# Altium PCB PCB_Control.V03.R00.PcbDoc (part 4 of 7)
Units mm, origin at the board's own origin, x right, y up, seen from the top; angles counter-clockwise.
Board outline 188 x 90 mm, 6 copper layers (Top Layer, GND 1, PWR, Signal L4, GND 2, Bottom Layer), stack 1.548 mm thick; 541 components, 265 nets, 1491 pads, 2159 vias.
Unrouted connection lines stored in the file: 819.
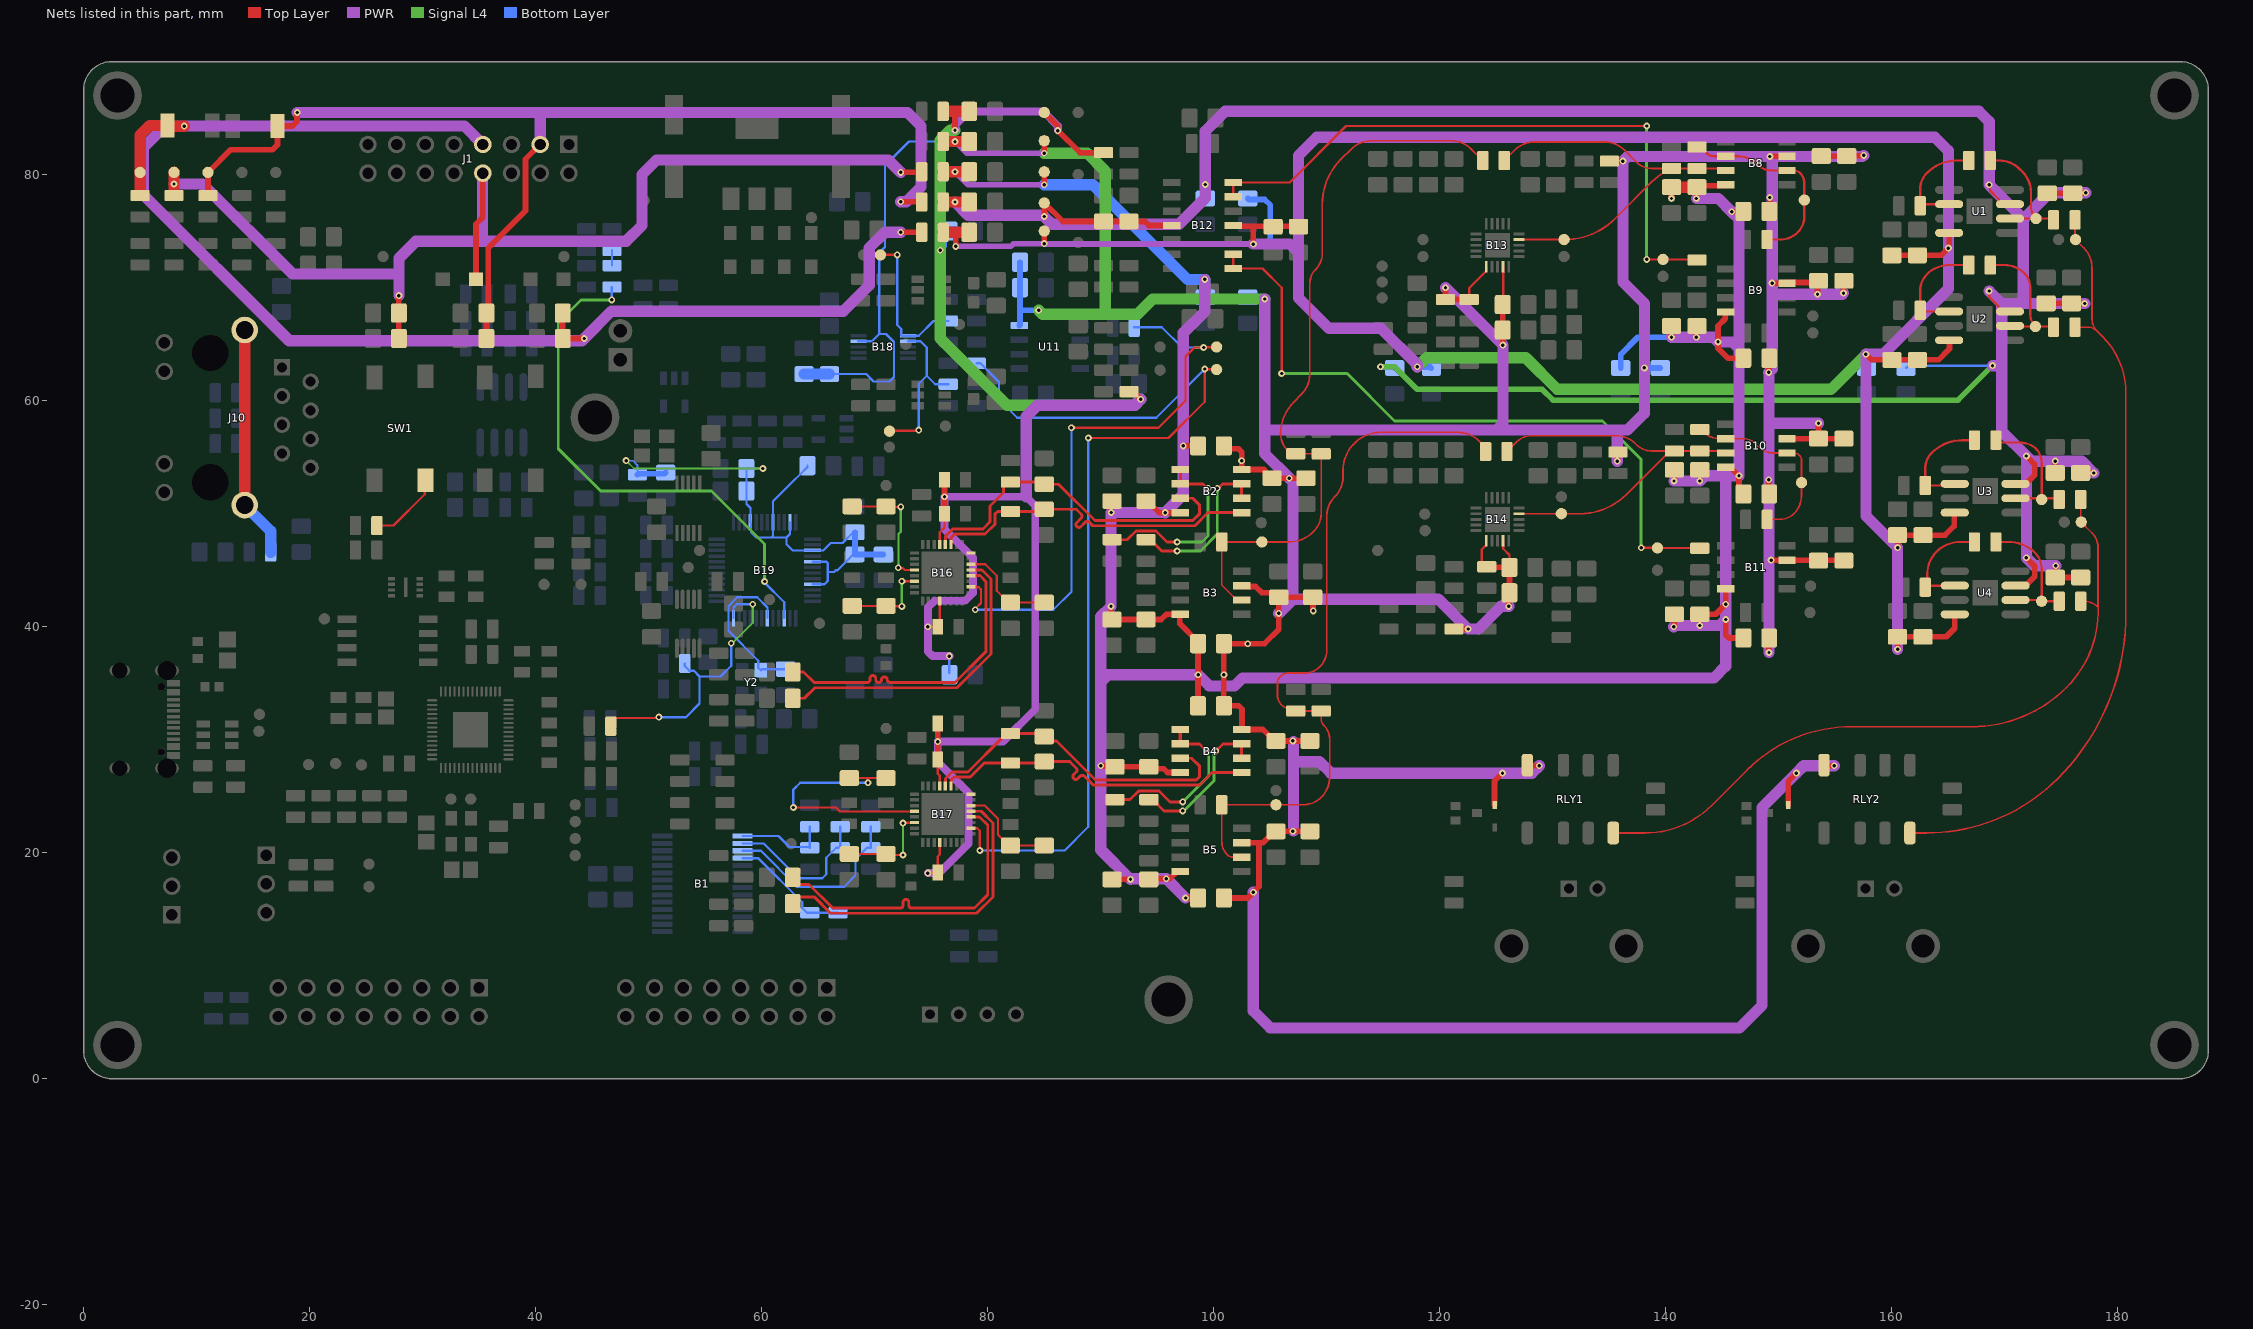
[diagram p7: the nets of this part, all layers, seen from the top]

## Via types
v1: diameter 0.6, hole 0.3, Top Layer to Bottom Layer, tented both sides, 1686 vias
v2: diameter 0.6, hole 0.3, Top Layer to Bottom Layer, 448 vias
v3: diameter 0.5, hole 0.2, Top Layer to Bottom Layer, tented both sides, 16 vias
v4: diameter 0.6, hole 0.25, Top Layer to Bottom Layer, tented both sides, 9 vias

## Nets (pads, with @x,y where several pads share a name; then routed paths per layer and width w, separated by ;. In a path a pad name is that pad's centre, name@x,y a point inside that pad or via, vN(x,y) a via of type N, cw(c..) or ccw(c..) an arc to the next point about the centre after c; other vN are vias at no path point) (continued)
+15V: C22.1 C23.1 D10.1 FB5.1 J1.3 R3.2 TP9.1 | length 100.8
  Top Layer w0.5: R3.2@11,78.15 TP9.1@11,80.2 13,82.2 16.7,82.2 17.15,82.65 D10.1@17.15,84.3 18.485,84.3 18.881,84.696 18.881,85.481 v1(18.9,85.5) ; C23.1@35.643,65.5 C22.1@35.643,67.75 35.8,67.907 35.8,73.5 39.1,76.8 39.1,81.37 J1.3@40.4,82.67 ; v1(72.3,77.6) 72.312,77.588 74.138,77.588 FB5.1@74.15,77.575
  PWR w1: v1(18.9,85.5) 40.4,85.5 ; J1.3@40.4,82.67 40.4,85.5 ; v1(72.3,77.6) 72.8,77.6 74.1,78.9 74.1,84.3 72.9,85.5 40.4,85.5
+A3V3: B16.12 B16.29 B17.12 B17.29 C8.1 C9.1 C10.1 C142.1 C143.1 C144.1 C156.1 C157.1 C158.1 FB2.2 R82.1 R87.1 TP2.1 | length 173.7
  Top Layer w0.2: v1(74.7,18.2) 75.525,18.2 C158.1@75.575,18.25 75.575,19.675 75.75,19.85 B17.12@75.75,20.925 ; v1(74.7,40) C143.1@75.575,40 75.75,40.175 B16.12@75.75,42.271 ; C157.1@75.575,28.25 75.575,27 75.75,26.825 B17.29@75.75,25.925 ; B16.29@75.75,47.271 75.75,48.35 76.175,48.775 C142.1@76.175,50
  Top Layer w0.5: C157.1@75.575,28.25 v1(75.575,29.837) C156.1@75.575,31.425 ; C142.1@76.175,50 v1(76.175,51.5) C144.1@76.175,53 ; v1(77.1,83.925) 77.1,85.496 77.204,85.6 ; TP2.1@85,85.5 86.181,84.319 86.181,83.919 v1(86.2,83.9) ; v1@86.233,83.933 86.233,83.867 88.15,81.95 R82.1@90.25,81.95 ; R87.1@92.5,60.8 92.85,60.8 v1(93.526,60.124)
  Top Layer w1: FB2.2@76.05,85.6 77.204,85.6 C8.1@78.357,85.6
  PWR w0.7: v1(74.7,18.2) 75.7,18.2 78.3,20.8 78.3,25.3 75.575,28.025 v1(75.575,29.837) 81.337,29.837 84.2,32.7 84.2,50.7 83.4,51.5 v1(76.175,51.5) 76.175,48.625 78.7,46.1 78.7,43 78,42.3 75.3,42.3 74.7,41.7 v1(74.7,40) 74.7,37.81 75.11,37.4 v1(76.6,37.4) ; v1(77.1,83.925) 77.1,84.4 78.3,85.6 84.9,85.6 86.2,84.3 v1(86.2,83.9)
  PWR w1: 83.4,51.5 83.4,58.6 84.4,59.6 93.001,59.6 v1(93.526,60.124)
  Signal L4 w1: v1(77.1,83.925) 76.686,83.925 75.8,83.039 75.8,65.5 81.7,59.6 93.001,59.6 v1(93.526,60.124)
  Bottom Layer w0.2: C10.1@76.6,35.9 v1(76.6,37.4)
  Bottom Layer w0.5: v1(75.8,73.3) 75.8,73.327 76.157,73.684 76.157,74.55 C9.1@76.607,75
+A5V: B2.8 B3.7 B4.8 B5.7 B8.7 B9.7 B10.7 B11.7 B13.6 B13.9 B14.6 B14.9 B18.9 C3.1 C4.1 C5.1 C46.2 C47.2 C50.2 C51.2 C52.2 C55.2 C56.2 C57.2 C60.2 C61.2 C62.2 C65.2 C87.2 C88.2 C89.2 C90.2 C91.2 C92.2 C97.2 C98.2 C99.2 C100.2 C101.2 C102.2 C124.2 C125.2 C135.2 C136.2 C176.2 C177.2 C178.2 C179.2 D11.1 D12.1 FB1.2 R90.2 R91.2 R97.2 R99.2 R100.2 R106.2 RLY1.8 RLY2.8 TP1.1 U11.8 | length 534.1
  Top Layer w0.2: R91.2@122.6,68.95 122.6,69.975 124.1,71.475 B13.6@124.1,71.85 ; B14.6@124.1,47.6 124.075,47.575 124.075,47.2 123.7,46.825 123.7,45.698 124.123,45.275 R100.2@124.175,45.275 ; C125.2@125.557,66.25 C125.2@125.6,66.293 ; B14.9@125.6,47.6 125.6,46.9 126.157,46.343 C135.2@126.157,45.25 ; C124.2@125.6,68.5 B13.9@125.6,71.85
  Top Layer w0.5: v1(85,81.9) TP1.1@85,83 ; C65.2@100.893,16 103,16 v1(103.5,16.5) 104,17 104,20.885 ; C50.2@100.893,56 101.143,55.75 102.169,55.75 102.462,55.457 v1(102.462,54.681) B2.8@102.462,53.905 104.438,53.905 104.55,53.793 104.55,53.593 105,53.143 C46.2@105.15,53.143 ; B5.7@102.462,20.885 104,20.885 ; B3.7@102.462,43.635 102.537,43.56 103.69,43.56 104.25,43 105.357,43 C51.2@105.75,42.607 C52.2@108.75,42.607 108.781,42.576 108.781,41.419 v1(108.8,41.4) ; C46.2@105.2,53.143 v1(106.675,53.143) C47.2@108.15,53.143 ; C51.2@105.75,42.607 v1(105.75,41.178) 105.75,39.75 104.5,38.5 v1(103,38.5) C55.2@100.893,38.5 v1(100.893,35.75) C60.2@100.893,33 102.207,33 102.5,32.707 102.5,30.943 B4.8@102.462,30.905 104.338,30.905 105.35,29.893 C56.2@105.5,29.893 v1(107,29.893) C57.2@108.5,29.893 ; C62.2@108.5,21.893 v1(107,21.893) C61.2@105.5,21.893 105.35,21.893 104.342,20.885 104,20.885 ; v1(120.5,70) R90.2@120.5,68.95 R91.2@122.6,68.95 ; R99.2@121.25,39.8 v1(122.5,39.8) ; R100.2@124.175,45.275 126.132,45.275 C135.2@126.157,45.25 C136.2@126.157,43 126.119,42.962 126.119,41.819 v1(126.1,41.8) ; D11.1@124.84,24.245 124.84,26.34 v1(125.545,27.045) ; C125.2@125.557,66.25 125.581,66.226 v1(125.581,64.919) ; C124.2@125.557,68.5 125.557,66.397 ccw(c125.704,66.397) C125.2@125.6,66.293 ; RLY1.8@127.739,27.75 127.789,27.7 v1(128.8,27.7) ; R97.2@135,81.2 v1(136.2,81.2) ; v1(135.7,54.65) 135.719,54.669 135.719,55.419 R106.2@135.75,55.45 ; v1(149.1,53) 149.119,52.981 149.119,51.774 C101.2@149.143,51.75 ; v1(149.1,62.5) 149.119,62.519 149.119,63.726 C92.2@149.143,63.75 ; v1(149.119,37.719) 149.119,38.976 C102.2@149.143,39 ; C91.2@149.143,76.75 149.181,76.788 v1(149.181,77.981) ; v1(149.2,81.6) 149.217,81.617 150.695,81.617 B8.7@150.712,81.635 ; v1(149.308,45.892) 150.705,45.892 B11.7@150.712,45.885 150.726,45.871 153.5,45.871 155.736,45.871 C100.2@155.75,45.857 ; v1(149.4,70.4) 149.408,70.392 150.705,70.392 B9.7@150.712,70.385 150.787,70.46 C89.2@153.419,70.46 ; B10.7@150.712,56.635 150.716,56.639 155.746,56.639 C97.2@155.75,56.643 ; D12.1@150.84,24.245 150.84,26.34 v1@151.554,27.054 ; v1(153.419,69.419) 153.419,70.526 C89.2@153.5,70.607 ; C98.2@153.5,56.643 v1(153.5,58) ; C88.2@153.75,81.639 155.996,81.639 156.038,81.681 157.481,81.681 v1(157.5,81.7) ; RLY2.8@153.989,27.75 154.039,27.7 v1(154.9,27.7) ; v1(155.719,69.519) 155.719,70.576 C90.2@155.75,70.607
  Top Layer w1: FB1.2@76.05,82.925 v1(77.1,82.925) C3.1@78.357,82.925
  PWR w0.5: v1(77.1,82.925) 78.125,81.9 v1(85,81.9)
  PWR w1: v1(103.5,16.5) 103.5,6 105,4.5 146.5,4.5 148.5,6.5 148.5,24 v1(151.545,27.045) 152.2,27.7 v1(154.9,27.7) ; v1(104.5,69) 104.5,57.4 ; v1(105.75,41.178) 107,42.428 ; v1@107.054,21.946 107.054,28.047 ; v1@107.054,29.84 107.054,28.047 ; v1(120.5,70) v1(125.581,64.919) 125.581,57.981 125,57.4 ; v1(126.1,41.8) 125.407,41.8 123.407,39.8 v1(122.5,39.8) 119.872,42.428 107,42.428 ; v1(128.8,27.7) 128.145,27.045 110.355,27.045 109.353,28.047 107.054,28.047 ; v1(135.7,54.65) 135.7,57 135.3,57.4 ; v1(149.119,37.719) 149.119,45.892 149.119,53 149.119,58 ; v1(153.5,58) 149.119,58 ; v1(155.719,69.519) 155.619,69.419 v1(153.419,69.419) 149.4,69.419 ; v1(157.5,81.7) 157.4,81.6 v1(149.2,81.6) ; 104.5,57.4 125,57.4 ; 104.5,57.4 104.5,55.318 v1(106.675,53.143) 107,52.818 107,42.428 ; 125,57.4 135.3,57.4 ; 135.3,57.4 136.6,57.4 138.1,58.9 v1(138.1,62.9) 138.1,68.6 136.2,70.5 v1(136.2,81.2) 136.6,81.6 v1(149.2,81.6) ; 149.119,58 149.119,62.481 v1(149.1,62.5) 149.4,62.8 149.4,69.419 ; v1(149.2,81.6) 149.4,81.4 149.4,77.981 v1(149.4,70.4) 149.4,69.419
  Signal L4 w1: v1(84.5,68) 84.85,67.65 90.1,67.65 ; v1(85,81.9) 88.8,81.9 90.4,80.3 90.4,67.95 90.1,67.65 ; v1(104.5,69) 94.6,69 93.25,67.65 90.1,67.65
  Bottom Layer w0.2: C178.2@66,62.357 69.243,62.357 69.9,61.7 71.3,61.7 71.7,62.1 71.7,65.2 71,65.9 70.4,65.9 ; B18.9@68.55,65.25 69.75,65.25 70.4,65.9 ; v1(77.1,82.925) 73.025,82.925 70.9,80.8 70.9,73.6 70.4,73.1 70.4,65.9
  Bottom Layer w0.5: U11.8@82.8,66.655 82.807,66.655 82.857,66.705 82.857,68 ; C176.2@82.857,72.25 C177.2@82.857,70 82.857,68 ; v1(84.5,68) 82.857,68 ; C4.1@102.85,69.143 C4.1@103,69.143 103.124,69.019 104.481,69.019 v1(104.5,69) ; v1(138.1,62.9) 138.104,62.896 139.497,62.896 C5.1@139.5,62.893
  Bottom Layer w1: C179.2@63.75,62.357 C178.2@66,62.357
+A15V: B12.4 C24.1 C25.1 C26.1 C27.1 C28.1 C29.1 C30.1 C31.1 C36.1 C37.1 C38.1 C39.1 C111.2 C112.2 FB5.2 TP12.1 U1.7 U2.7 U3.7 U4.7 | length 275.5
  Top Layer w0.2: v1(168.6,69.7) 168.6,69.176 169.444,68.331 169.444,68.116 169.675,67.885 U2.7@170.44,67.885 ; v1(168.6,79.1) 168.677,79.023 168.677,78.599 169.456,77.82 169.456,77.616 169.687,77.385 U1.7@170.44,77.385
  Top Layer w0.5: v1(85,76.3) TP12.1@85,77.5 86.643,75.857 C111.2@90.25,75.857 C112.2@92.5,75.857 93.893,75.857 94.25,75.5 B12.4@96.288,75.5 ; U4.7@170.94,43.635 171.84,43.635 172.64,44.435 172.64,45.355 171.9,46.095 v1(171.9,46.1) ; U3.7@170.94,52.635 171.84,52.635 172.64,53.435 172.64,54.36 v1(171.9,55.1) ; C30.1@173.65,68.607 C31.1@175.9,68.607 175.904,68.604 177.047,68.604 v1(177.05,68.6) ; C28.1@173.75,78.357 C29.1@176,78.357 176.024,78.381 177.131,78.381 v1(177.15,78.4) ; C36.1@174.45,53.607 v1(174.45,54.65) ; v1(174.5,45.4) 174.481,45.381 174.481,44.388 C38.1@174.45,44.357 C39.1@176.7,44.357 ; C37.1@176.7,53.607 176.704,53.603 177.847,53.603 v1(177.85,53.6)
  Top Layer w1: FB5.2@76.05,77.575 v1(77.1,77.575) C24.1@78.357,77.575
  PWR w1: v1(77.1,77.575) 78.275,76.4 84.9,76.4 85.7,75.6 96.9,75.6 99.25,77.95 v1(99.25,79.123) 99.25,83.85 101,85.6 167.7,85.6 168.6,84.7 v1(168.6,79.1) 171.629,76.071 ; v1(168.6,69.7) 169.7,68.6 171.629,68.6 ; v1(168.9,63.1) 169.71,63.1 ; 169.71,68.6 169.71,63.1 ; v1(174.5,45.4) 172.6,45.4 v1(171.9,46.1) v1(171.9,55.1) ; v1(177.05,68.6) 171.629,68.6 ; v1(177.15,78.4) 173.957,78.4 171.629,76.071 ; v1(177.85,53.6) 176.8,54.65 v1(174.45,54.65) 172.35,54.65 v1(171.9,55.1) ; 169.71,63.1 169.71,57.29 v1(171.9,55.1) ; 171.629,68.6 171.629,76.071
  Signal L4 w0.5: v1(114.75,63) 116,63 118,61 129.057,61 130.007,60.05 165.85,60.05 v1(168.9,63.1)
  Bottom Layer w0.2: C26.1@161.25,62.893 161.457,63.1 v1(168.9,63.1)
  Bottom Layer w0.5: C25.1@99.25,77.893 v1(99.25,79.123) ; v1(114.75,63) 114.769,62.981 115.912,62.981 C27.1@116,62.893
-5V: C11.1 C12.1 D3.2 FB3.1 J1.8 R4.2 TP10.1 | length 101
  Top Layer w0.5: C12.1@27.893,65.5 C11.1@27.893,67.75 27.897,67.753 27.897,69.297 v1(27.9,69.3) ; D3.2@34.725,70.75 34.725,75.625 35.32,76.22 J1.8@35.32,80.13 ; v1(72.3,80.2) 72.319,80.219 74.119,80.219 FB3.1@74.15,80.25
  Top Layer w1: R4.2@8,78.15 TP10.1@8,80.2
  PWR w1: v1(8,79.175) 10.525,79.175 18.5,71.2 27.9,71.2 ; v1(27.9,69.3) 27.9,71.2 ; J1.8@35.32,80.13 35.32,79.896 35.3,79.876 35.3,74.2 35.2,74.1 ; v1(72.3,80.2) 71.2,81.3 50.7,81.3 49.4,80 49.4,75.5 48,74.1 35.2,74.1 ; 27.9,71.2 27.9,72.6 29.4,74.1 35.2,74.1
-15V: C16.1 C17.1 D4.2 FB4.1 J1.7 R5.2 TP11.1 | length 129.6
  Top Layer w0.5: C16.1@42.393,67.75 C17.1@42.393,65.5 v1(44.3,65.5) ; v1(72.3,74.9) FB4.1@74.15,74.9
  Top Layer w1: R5.2@5,78.15 TP11.1@5,80.2 5,83.5 5.85,84.35 D4.2@7.42,84.35 7.477,84.293 v1(8.907,84.293)
  PWR w1: v1(8.907,84.293) 8.9,84.3 7.2,84.3 5.3,82.4 5.3,78.2 18.2,65.3 44.1,65.3 v1(44.3,65.5) 46.719,67.919 46.774,67.919 46.775,67.92 48.225,67.92 48.226,67.919 67.219,67.919 69.5,70.2 69.5,73.5 70.9,74.9 v1(72.3,74.9) ; v1@8.907,84.3 33.69,84.3 J1.7@35.32,82.67
-A5V: B2.4 B3.4 B4.4 B5.4 B8.4 B9.4 B10.4 B11.4 C13.1 C14.1 C15.1 C48.2 C49.2 C50.1 C53.2 C54.2 C55.1 C58.2 C59.2 C60.1 C63.2 C64.2 C65.1 C91.1 C92.1 C93.1 C94.1 C95.1 C96.1 C101.1 C102.1 C103.1 C104.1 C105.1 C106.1 FB3.2 TP5.1 | length 287.8
  Top Layer w0.5: v1(85,79.1) TP5.1@85,80.25 ; v1(90,27.7) 90.019,27.681 91.176,27.681 C59.2@91.25,27.607 C58.2@94.25,27.607 94.414,27.443 95.557,27.443 95.897,27.103 97.03,27.103 B4.4@97.038,27.095 ; v1(90.9,41.8) 90.919,41.781 90.919,40.724 C54.2@91,40.643 C53.2@94,40.643 95.343,40.643 95.795,41.095 B3.4@97.038,41.095 97,41.057 97,40.257 98.607,38.65 C55.1@98.607,38.5 v1(98.607,35.75) C60.1@98.607,33 ; v1(90.919,50.107) 90.938,50.126 90.938,51.045 C49.2@91,51.107 ; C64.2@91,17.643 v1(92.625,17.643) ; C48.2@94.15,51.107 95.162,50.095 v1(95.7,50.095) B2.4@97.038,50.095 ; C63.2@94.25,17.643 94.307,17.7 v1@95.773,17.7 ; v1(95.8,17.7) 95.819,17.719 96.119,17.719 96.526,18.126 96.526,18.27 96.601,18.345 B5.4@97.476,18.345 ; v1(97.3,56) C50.1@98.607,56 ; v1(97.5,16) C65.1@98.607,16 ; v1(140.5,65.607) C96.1@140.5,66.607 ; v1(140.5,77.893) C94.1@140.5,78.893 ; v1(140.7,40) 140.719,40.019 140.719,41.076 C106.1@140.75,41.107 ; v1(140.719,52.893) 140.735,52.908 140.735,53.878 C103.1@140.75,53.893 ; v1(142.7,65.607) 142.719,65.626 142.719,66.576 C95.1@142.75,66.607 ; v1(142.7,77.893) 142.719,77.912 142.719,78.862 C93.1@142.75,78.893 ; C93.1@142.877,79.02 145.213,79.02 B8.4@145.288,79.095 ; v1(143,40.107) C105.1@143,41.107 144.407,41.107 v1(145.288,41.988) B11.4@145.288,43.345 ; v1(143,52.893) C104.1@143,53.893 ; v1(145.288,40.64) 145.288,39.293 145.581,39 C102.1@146.857,39 ; B10.4@145.288,54.095 145.726,54.095 v1(146.471,53.35) 146.471,52.136 C101.1@146.857,51.75 ; B9.4@145.288,67.845 145.25,67.807 145.25,67.25 144.607,66.607 v1(144.607,65.2) 144.607,64.643 145.5,63.75 C92.1@146.857,63.75 ; v1(145.819,76.719) 146.826,76.719 C91.1@146.857,76.75
  Top Layer w1: FB3.2@76.05,80.25 v1(77.1,80.25) C13.1@78.357,80.25 ; C94.1@140.5,78.893 C93.1@142.75,78.893 C93.1@142.877,79.02
  PWR w0.5: v1(77.1,80.25) 78.25,79.1 v1(85,79.1)
  PWR w1: v1(97.5,16) v1(95.8,17.7) 92.682,17.7 v1(92.625,17.643) 90,20.268 v1(90,27.7) 90,35.1 ; v1(99.205,70.729) 99.205,67.905 97.3,66 v1(97.3,56) 97.3,51.695 v1(95.7,50.095) 95.688,50.107 v1(90.919,50.107) 90.9,50.088 v1(90.9,41.8) 90,40.9 90,35.1 ; v1(140.5,65.607) v1(142.7,65.607) 144.2,65.607 v1(144.607,65.2) 145.9,65.2 146.471,64.629 ; v1(140.7,40) 140.807,40.107 v1(143,40.107) 144.755,40.107 v1(145.288,40.64) ; v1(140.719,52.893) v1(143,52.893) 143.457,53.35 145.288,53.35 ; v1(142.7,77.893) 144.645,77.893 v1(145.819,76.719) 146.471,76.068 146.471,64.629 ; 90,35.1 90.65,35.75 v1(98.607,35.75) 99.607,34.75 101.836,34.75 102.554,35.468 144.244,35.468 145.288,36.512 v1(145.288,40.64) ; v1(145.288,40.64) v1(145.288,41.988) 145.288,53.35 ; 145.288,53.35 v1(146.471,53.35) 146.471,64.629
  Bottom Layer w0.5: C15.1@136,62.893 136,64.1 137.507,65.607 v1(140.5,65.607)
  Bottom Layer w1: v1(85,79.1) 89.3,79.1 97.671,70.729 v1(99.205,70.729) 99.205,69.188 C14.1@99.25,69.143
-A15V: B12.11 C18.1 C19.1 C20.1 C21.1 C32.1 C33.1 C34.1 C35.1 C40.1 C41.1 C42.1 C43.1 C113.2 C114.2 FB4.2 TP6.1 U1.4 U2.4 U3.4 U4.4 | length 259.1
  Top Layer w0.5: v1(77.168,73.651) 77.153,73.666 77.153,74.849 77.204,74.9 ; v1(85,73.9) TP6.1@85,75 ; B12.11@101.712,75.5 101.766,75.446 103.5,75.446 ; v1(103.5,73.857) 103.5,75.446 ; C114.2@107.5,75.393 107.447,75.446 103.5,75.446 ; v1(157.7,64.1) 157.727,64.1 158.22,63.607 C35.1@160,63.607 C34.1@162.25,63.607 164.107,63.607 165.1,64.6 165.1,65.305 U2.4@165.06,65.345 ; C33.1@160,72.857 C32.1@162.25,72.857 164.357,72.857 165.06,73.56 U1.4@165.06,74.845 ; v1(160.5,38) C43.1@160.5,39.107 C42.1@162.75,39.107 164.807,39.107 165.56,39.86 U4.4@165.56,41.095 ; v1(160.5,47) C41.1@160.5,48.107 C40.1@162.75,48.107 164.707,48.107 165.5,48.9 165.5,50.035 U3.4@165.56,50.095
  Top Layer w1: FB4.2@76.05,74.9 77.204,74.9 C18.1@78.357,74.9
  PWR w0.5: v1(77.168,73.651) v1(77.168,73.651) 82.05,73.65 82.273,73.873 84.902,73.873 84.91,73.881 84.965,73.881 v1@84.973,73.873 ; v1(85,73.9) 85.019,73.881 85.09,73.881 85.114,73.857 v1(103.5,73.857)
  PWR w1: v1(103.5,73.857) 106.743,73.857 107.5,73.1 ; v1(118,63) 118,63.2 114.8,66.4 110.2,66.4 107.5,69.1 107.5,73.1 ; v1(160.5,38) v1(160.5,47) 157.7,49.8 v1(157.7,64.1) 159.2,64.1 165,69.9 v1(165,73.5) 165,82.1 163.8,83.3 109.1,83.3 107.5,81.7 107.5,73.1
  Signal L4 w1: v1(118,63) 118.027,63 118.827,63.8 127.6,63.8 130.4,61 154.6,61 v1(157.7,64.1)
  Bottom Layer w0.5: C19.1@103,77.893 103.093,77.8 104.5,77.8 105,77.3 105,74.3 104.557,73.857 v1(103.5,73.857) ; v1(118,63) 118.019,62.981 119.162,62.981 C21.1@119.25,62.893 ; v1(157.7,64.1) 157.719,64.081 157.719,62.924 C20.1@157.75,62.893
\USB_BOOT: R66.1 SW1.3 | length 7.1
  Top Layer w0.2: R66.1@25.95,48.95 27.417,48.95 30.184,51.717 30.184,52 30.467,52 30.659,52.191 30.659,52.541 SW1.3@30.25,52.95
ACT_LED: B19.27 R163.2 | length 46.9
  Signal L4 w0.254: v1(46.732,68.919) 44.019,68.919 42,66.9 42,55.75 45.75,52 55.558,52 60.25,47.308 v1(60.25,44)
  Bottom Layer w0.2: v1(46.732,68.919) 46.732,70.032 R163.2@46.75,70.05 ; v1(60.25,44) 60.25,43.919 62,42.169 B19.27@62,40.762
ACT_LED_K: R152.2 R163.1 | length 1.3
  Bottom Layer w0.2: R163.1@46.75,71.95 R152.2@46.75,73.3
AD9102_CAL_SENSE_DDS1: B16.24
AD9102_CAL_SENSE_DDS2: B17.24
AD9102_CLDO_DDS1: B16.22 C147.2 C148.2 | length 8.7
  Top Layer w0.2: B16.22@78.5,45.521 79.779,45.521 80.8,44.5 80.8,43.193 81.85,42.143 C148.2@82,42.143 C147.2@85,42.143
AD9102_CLDO_DDS2: B17.22 C161.2 C162.2 | length 8.8
  Top Layer w0.2: B17.22@78.5,24.175 79.725,24.175 80.9,23 80.9,21.593 81.85,20.643 C162.2@82,20.643 C161.2@85,20.643
AD9102_CLK_DDS1_N: B16.20 C167.1 | length 27.8
  Top Layer w0.254: C167.1@62.743,36 63.7,36 64.64,35.06 69.2,35.06 69.327,35.06 ccw(c69.327,35.314) 69.581,35.314 69.581,35.434 cw(c69.835,35.434) 70.089,35.434 70.089,35.308 ccw(c70.343,35.308) 70.597,35.308 70.597,35.314 cw(c70.851,35.314) 71.105,35.314 ccw(c71.359,35.314) 71.359,35.06 73.5,35.06 77.1,35.06 79.827,37.787 79.827,44.007 79.314,44.521 B16.20@78.5,44.521
AD9102_CLK_DDS1_P: B16.21 C168.1 | length 27.9
  Top Layer w0.254: C168.1@62.743,33.667 63.767,33.667 64.7,34.6 77.282,34.6 80.281,37.599 80.281,44.219 79.479,45.021 B16.21@78.5,45.021
AD9102_CLK_DDS2_N: B17.20 C169.1 | length 28
  Top Layer w0.254: C169.1@62.743,17.833 62.743,17.769 63.312,17.2 64.183,17.2 66.283,15.1 67.07,15.1 71.6,15.1 72.249,15.1 ccw(c72.249,15.354) 72.503,15.354 72.503,15.619 cw(c72.757,15.619) 73.011,15.619 73.011,15.354 ccw(c73.265,15.354) 73.265,15.1 73.9,15.1 78.817,15.1 80,16.283 80,22.456 79.281,23.175 B17.20@78.5,23.175
AD9102_CLK_DDS2_P: B17.21 C170.1 | length 28.1
  Top Layer w0.254: C170.1@62.743,15.5 62.743,15.531 63.312,16.1 64.641,16.1 66.095,14.646 72.1,14.646 76.7,14.646 79.005,14.646 80.454,16.095 80.454,22.644 79.423,23.675 B17.21@78.5,23.675
AD9102_DLDO1_DDS1: B16.6 C149.2 C150.2 | length 7.7
  Top Layer w0.2: C149.2@68,41.843 C150.2@71,41.843 71.043,41.8 v1(72.4,41.8) ; v1(72.4,44.021) B16.6@73.5,44.021
  Signal L4 w0.2: v1(72.4,41.8) v1(72.4,44.021)
AD9102_DLDO1_DDS2: B17.6 C163.2 C164.2 | length 8.6
  Top Layer w0.2: C164.2@67.75,19.893 C163.2@71,19.893 71.093,19.8 v1(72.5,19.8) ; v1(72.5,22.625) 72.525,22.65 73.475,22.65 B17.6@73.5,22.675
  Signal L4 w0.2: v1(72.5,19.8) v1(72.5,22.625)
AD9102_DLDO2_DDS1: B16.4 C151.2 C152.2 | length 11.3
  Top Layer w0.2: C152.2@68,50.643 C151.2@71,50.643 71.043,50.6 v1(72.3,50.6) ; v1(72.088,45.217) 72.121,45.184 72.503,45.184 72.663,45.023 72.677,45.023 72.679,45.021 B16.4@73.5,45.021
  Signal L4 w0.2: v1(72.088,45.217) 72.1,45.23 72.1,48.2 72.3,48.4 v1(72.3,50.6)
AD9102_DLDO2_DDS2: B17.4 C165.2 C166.2 | length 23
  Top Layer w0.2: v1(62.8,24) 66.576,24 66.926,23.65 73.475,23.65 B17.4@73.5,23.675 ; C166.2@67.75,26.607 69.375,26.607 ; v1(69.4,26.2) 69.375,26.225 69.375,26.607 ; C165.2@71,26.607 69.375,26.607
  Bottom Layer w0.2: v1(62.8,24) 62.8,25.6 63.4,26.2 v1(69.4,26.2)
AMPL_VOUT_Amplificador1: R8.2 R11.2 RLY2.4 TP15.1 | length 68.8
  Top Layer w0.15: RLY2.4@161.589,21.75 163.059,21.75 ccw(c163.06,38.179) 174.675,26.56 ccw(c160.135,41.104) 180.7,41.104 180.7,60.709 ccw(c173.722,60.709) 178.656,65.644 178.124,66.176 ; R11.2@176.2,66.5 177.341,66.5 cw(c177.341,65.393) 178.124,66.176 ; R8.2@176.2,76 176.2,74.371 ccw(c176.371,74.371) TP15.1@176.25,74.25 176.956,73.544 cw(c175.16,71.748) 177.7,71.748 177.7,67.2 ccw(c179.149,67.2) 178.124,66.176
AMPL_VOUT_Amplificador2: R14.2 R17.2 RLY1.4 TP19.1 | length 63.9
  Top Layer w0.15: RLY1.4@135.339,21.75 138.17,21.75 138.171,21.75 ccw(c138.173,30.056) 144.045,24.182 147.191,27.328 cw(c156.418,18.102) 156.418,31.15 167.059,31.15 167.061,31.15 ccw(c167.064,43.002) 175.445,34.622 ccw(c168.677,41.388) 178.242,41.725 ; R14.2@176.7,51.25 176.7,49.371 ccw(c176.871,49.371) TP19.1@176.75,49.25 177.706,48.294 cw(c176.422,47.01) 178.238,47.01 178.238,41.725 ccw(c176.97,40.458) 176.97,42.25 R17.2@176.7,42.25 R17.2@177.015,42.25
AO1_-IN_Amplificador1: R6.1 R7.2 U1.2 | length 9.7
  Top Layer w0.2: U1.2@165.06,77.385 162.826,77.385 ccw(c162.826,76.924) R7.2@162.5,77.25 162.5,77.975 162.5,78.705 cw(c164.552,78.701) 163.101,80.152 cw(c165.75,77.504) 165.75,81.25 166.425,81.25 R6.1@166.8,81.25
AO1_-IN_Amplificador2: R12.1 R13.2 U3.2 | length 9.8
  Top Layer w0.2: U3.2@165.56,52.635 cw(c165.234,52.961) 165.234,52.5 R13.2@162.95,52.5 162.95,53.917 cw(c164.939,53.988) 163.532,55.395 cw(c166.2,52.726) 166.2,56.5 166.925,56.5 R12.1@167.3,56.5
AO1_VOUT_Amplificador1: R6.2 R8.1 TP14.1 U1.6 | length 11.5
  Top Layer w0.2: R6.2@168.7,81.25 169.498,81.25 cw(c169.498,78.71) 171.294,80.506 171.556,80.244 cw(c169.76,78.448) 172.3,78.448 172.3,77.203 172.3,77.201 ccw(c173.836,77.201) TP14.1@172.75,76.115 ; U1.6@170.44,76.115 TP14.1@172.75,76.115 ; R8.1@174.3,76 ccw(c174.022,75.722) 174.022,76.115 TP14.1@172.75,76.115
AO1_VOUT_Amplificador2: R12.2 R14.1 TP18.1 U3.6 | length 12.3
  Top Layer w0.2: R12.2@169.2,56.5 169.575,56.3 171.311,56.3 171.313,56.3 cw(c171.31,54.113) 172.684,55.814 cw(c172.558,55.66) 172.694,55.806 cw(c172.558,55.66) 172.7,55.801 cw(c171.339,54.459) 173.25,54.456 TP18.1@173.25,51.25 ; U3.6@170.94,51.365 174.522,51.365 cw(c174.522,50.972) R14.1@174.8,51.25
AO2_-IN_Amplificador1: R9.1 R10.2 U2.2 | length 9.9
  Top Layer w0.2: U2.2@165.06,67.885 162.778,67.885 cw(c162.778,68.278) R10.2@162.5,68 162.5,69.721 cw(c164.585,69.721) 163.111,71.196 cw(c165.052,69.254) 165.052,72 R9.1@166.8,72
AO2_-IN_Amplificador2: R15.1 R16.2 U4.2 | length 9.5
  Top Layer w0.2: R16.2@162.95,43.5 cw(c163.276,43.174) 163.276,43.635 U4.2@165.56,43.635 ; R16.2@163.13,43.611 163.13,44.681 ; 163.13,44.682 cw(c165.874,44.682) 163.934,46.622 cw(c166.052,44.504) 166.052,47.5 R15.1@167.3,47.5
AO2_VOUT_Amplificador1: R9.2 R11.1 TP17.1 U2.6 | length 12.1
  Top Layer w0.2: R9.2@168.7,72 169.948,72 cw(c169.948,69.46) 171.744,71.256 cw(c170.548,70.06) 172.239,70.06 172.239,67.653 ccw(c173.79,67.653) TP17.1@172.693,66.557 ; U2.6@170.44,66.615 ccw(c170.581,66.757) 170.581,66.557 TP17.1@172.693,66.557 ; R11.1@174.3,66.5 173.925,66.557 TP17.1@172.693,66.557
AO2_VOUT_Amplificador2: R15.2 R17.1 TP21.1 U4.6 | length 12.1
  Top Layer w0.2: R15.2@169.2,47.5 170.348,47.5 cw(c170.348,44.232) 172.659,46.543 cw(c171.231,45.115) 173.25,45.115 TP21.1@173.25,42.25 ; U4.6@170.94,42.365 172.972,42.365 cw(c172.972,41.972) TP21.1@173.25,42.25 ; R17.1@174.8,42.25 TP21.1@173.25,42.25
AVDD: B19.4 B19.8 B19.11 B19.15 B19.17 B19.21 C190.2 C191.2 C192.2 C193.2 C194.2 C195.2 C196.2 FB7.2 | length 56.2
  Signal L4 w0.152: v1(48,54.7) 48.7,54 v1(60.1,54)
  Bottom Layer w0.152: v1@48.01,54.69 48.61,54.69 49,54.3 FB7.2@49,53.45 ; C193.2@58.643,54 v1(60.1,54)
  Bottom Layer w0.2: C193.2@58.643,54 C192.2@58.643,52 58.643,50.857 59,50.5 B19.4@59,49.238 59.05,49.188 59.05,48.376 59.526,47.9 60.863,47.9 ; B19.11@62.5,49.238 62.5,48.2 62.2,47.9 ; C195.2@64.057,54.25 64.057,54.141 63.416,53.5 63.4,53.5 62.7,52.8 61,51.1 B19.8@61,49.238 61,48.037 60.863,47.9 ; B19.21@64.488,43.75 65.55,43.75 65.85,44.05 65.85,44.841 ; B19.17@64.488,45.75 65.733,45.75 65.85,45.633 65.85,44.841 ; C190.2@68.25,46.393 68.093,46.393 66.7,45 66.551,45 66.393,44.841 65.85,44.841 ; C194.2@68.25,48.357 68.1,48.357 67.143,47.4 66.1,47.4 65.45,46.75 B19.15@64.488,46.75 62.75,46.75 62.2,47.3 62.2,47.9 ; 60.863,47.9 62.2,47.9
  Bottom Layer w0.5: FB7.2@49,53.45 49.097,53.546 51.404,53.546 C196.2@51.5,53.643 ; C194.2@68.25,48.357 C190.2@68.25,46.393 C191.2@70.75,46.393
CLKIN: B19.30 C188.2 Y2.3 | length 14
  Bottom Layer w0.2: Y2.3@59.925,36.15 59.7,36.375 59.7,36.983 57.05,39.632 57.05,41.816 57.83,42.596 59.604,42.596 60.5,41.7 B19.30@60.5,40.762 ; Y2.3@60.018,36.243 C188.2@62.1,36.243
DAC8562_VOUTA: B18.1 R124.2 TP81.1 | length 13.5
  Top Layer w0.2: TP81.1@70.5,72.9 v1(72,72.9)
  Bottom Layer w0.2: v1(72,72.9) 72,66.7 72.35,66.35 72.35,65.8 72.4,65.75 B18.1@72.95,65.75 73.9,65.75 75.2,67.05 R124.2@76.5,67.05
DAC8562_VOUTB: B18.2 R128.2 TP83.1 | length 14.3
  Top Layer w0.2: TP83.1@71.3,57.3 71.35,57.35 73.85,57.35 v1(73.9,57.4)
  Bottom Layer w0.2: B18.2@72.95,65.25 74.05,65.25 74.6,64.7 74.6,62.2 ; v1(73.9,57.4) 73.9,61.5 74.6,62.2 ; R128.2@76.5,61.45 75.35,61.45 74.6,62.2
DAC_DC_VIN_Offset1: B12.13 B12.14 R70.1 TP60.1 | length 56.2
  Top Layer w0.2: B12.13@101.712,78.04 B12.14@101.712,79.31 106.71,79.31 111.7,84.3 v1(138.3,84.3) ; v1(138.3,72.5) TP60.1@139.75,72.5 142.7,72.5 R70.1@142.75,72.45
  Signal L4 w0.254: v1(138.3,72.5) v1(138.3,84.3)
DAC_DC_VIN_Offset2: B12.8 B12.9 R75.1 TP65.1 | length 61.8
  Top Layer w0.2: B12.9@101.712,72.96 B12.8@101.712,71.69 104.31,71.69 106,70 v1(106,62.4) ; v1(137.813,46.987) 139.238,46.987 TP65.1@139.25,46.975 142.94,46.975 cw(c142.94,46.89) R75.1@143,46.95
  Signal L4 w0.254: v1(106,62.4) 111.8,62.4 116,58.2 134.4,58.2 137.813,54.787 v1(137.813,46.987)
DDS_IOUT_DDS1_N: B2.3 B16.28 C146.1 R110.2 | length 30.7
  Top Layer w0.254: B16.28@76.25,47.271 76.25,48.009 76.895,48.654 79.571,48.654 80.2,49.283 80.2,50.675 81.402,51.877 81.402,52.427 81.775,52.8 R110.2@82,52.8 84.807,52.8 C146.1@85,52.607 86.252,52.607 89.474,49.385 98.135,49.385 98.75,50 98.75,50.75 98.135,51.365 B2.3@97.038,51.365
DDS_IOUT_DDS1_P: B2.5 B16.27 C145.1 R109.2 | length 30.6
  Top Layer w0.254: B16.27@76.75,47.271 76.75,47.867 77.083,48.2 79.759,48.2 80.654,49.095 80.654,50 80.854,50.2 R109.2@82,50.2 84.807,50.2 C145.1@85,50.393 87.795,50.393 87.824,50.393 87.899,50.318 88.259,49.959 cw(c88.079,49.779) 88.259,49.599 87.881,49.221 ccw(c88.06,49.042) 87.881,48.862 ccw(c88.06,49.042) 88.24,48.862 88.618,49.24 cw(c88.797,49.061) 88.977,49.24 89.286,48.931 89.467,48.931 98.323,48.931 99.487,50.095 B2.5@102.462,50.095
DDS_IOUT_DDS2_N: B4.3 B17.28 C160.1 R113.2 | length 29.5
  Top Layer w0.254: B17.28@76.25,25.925 76.25,26.579 76.825,27.154 78.254,27.154 81.277,30.177 81.627,30.177 R113.2@82,30.55 84.732,30.55 85.401,29.881 86.078,29.881 89.521,26.439 98.439,26.439 98.75,26.75 98.75,27.65 98.035,28.365 B4.3@97.038,28.365
DDS_IOUT_DDS2_P: B4.5 B17.27 C159.1 R112.2 | length 29.4
  Top Layer w0.254: B17.27@76.75,25.925 76.773,25.948 76.773,26.46 77.013,26.7 78.442,26.7 79.692,27.95 R112.2@82,27.95 84.882,27.95 C159.1@85,28.068 87.249,28.068 87.371,27.946 87.82,27.497 cw(c87.64,27.318) 87.82,27.138 87.604,26.922 ccw(c87.783,26.742) 87.604,26.563 ccw(c87.783,26.742) 87.963,26.563 88.179,26.779 cw(c88.359,26.599) 88.538,26.779 88.84,26.478 89.333,25.985 98.735,25.985 99.845,27.095 B4.5@102.462,27.095
DDS_REFIO_CH1: B16.18 R126.2 TP26.1 | length 51.7
  Top Layer w0.2: B16.18@78.5,43.521 78.521,43.5 79.2,43.5 79.4,43.3 79.4,42.1 78.9,41.6 v1(78.9,41.5) ; v1(87.4,57.6) 95.1,57.6 97.5,60 97.5,63.9 98.3,64.7 v1(99.1,64.7) 99.125,64.725 100.225,64.725 TP26.1@100.25,64.75
  Bottom Layer w0.2: v1(78.9,41.5) 85.8,41.5 87.4,43.1 v1(87.4,57.6) ; R126.2@92.95,66.5 95.4,66.5 97.2,64.7 v1(99.1,64.7)
DDS_REFIO_CH2: B17.18 R130.2 TP27.1 | length 88
  Top Layer w0.2: B17.18@78.5,22.175 79.075,22.175 79.3,21.95 v1(79.3,20.2) ; v1(88.9,56.7) 96,56.7 99.2,59.9 v1(99.2,62.8) 99.225,62.775 100.225,62.775 TP27.1@100.25,62.75
  Bottom Layer w0.2: R130.2@79,63.3 79.35,63.3 81,61.65 81,60.1 82.6,58.5 94.9,58.5 v1(99.2,62.8) ; v1(79.3,20.2) 86.8,20.2 88.9,22.3 v1(88.9,56.7)
DDS_VOUT_Conversor_Diff_A_Simple1: B3.6 R22.1 R23.1 R24.1 R51.2 TP46.1 | length 65.8
  Top Layer w0.16: B3.6@102.462,42.365 102.025,42.365 100.7,43.689 R51.2@100.7,47.5 TP46.1@104.25,47.5 106.647,47.5 ; 106.648,47.5 ccw(c106.648,50.523) 108.785,48.385 108.859,48.459 ccw(c107.31,50.007) 109.5,50.007 R23.1@109.5,55.3 R24.1@107.25,55.3 106.525,55.603 cw(c107.994,57.076) 105.913,57.075 cw(c109.868,57.075) 107.07,59.87 107.754,60.554 ccw(c105.988,62.321) 108.486,62.314 108.486,70.36 cw(c110.24,70.36) 109,71.6 ccw(c107.551,73.049) 109.6,73.049 109.6,73.7 109.6,77.375 ; 109.6,77.376 cw(c115.213,77.375) 111.244,81.344 112.156,82.256 cw(c113.952,80.46) 113.952,83 120.998,83 cw(c120.998,80.46) 122.794,82.256 R22.1@123.8,81.25
DDS_VOUT_Conversor_Diff_A_Simple1_N: B2.6 B2.7 R52.1 | length 15
  Top Layer w0.254: R52.1@94,47.7 94.373,47.327 94.773,47.327 95.4,46.7 v1(96.75,46.7) ; v1(100.3,52.25) 100.394,52.25 100.779,52.635 B2.7@102.462,52.635 B2.6@102.462,51.365
  Signal L4 w0.254: v1(96.75,46.7) 98.809,46.7 100.3,48.191 v1(100.3,52.25)
DDS_VOUT_Conversor_Diff_A_Simple1_P: B2.1 B2.2 R53.1 | length 17.6
  Top Layer w0.254: R53.1@91,47.7 92.331,47.7 93.108,48.477 94.892,48.477 95.869,47.5 v1(96.75,47.5) ; B2.1@97.038,53.905 B2.2@97.038,52.635 99.021,52.635 99.406,52.25 v1(99.5,52.25)
  Signal L4 w0.254: v1(96.75,47.5) 98.967,47.5 99.5,48.033 v1(99.5,52.25)
DDS_VOUT_Conversor_Diff_A_Simple2: B5.6 R25.1 R26.1 R27.1 R55.2 TP48.1 | length 66.2
  Top Layer w0.16: B5.6@102.462,19.615 101.8,19.627 cw(c101.691,20.341) 101.183,19.827 cw(c102.371,21.002) 100.7,21.002 R55.2@100.7,24.25 TP48.1@105.5,24.25 107.948,24.25 ccw(c107.948,26.443) 109.497,24.891 ; 109.498,24.892 ccw(c107.686,26.706) 110.25,26.706 110.25,30.043 ccw(c108.543,30.043) 109.75,31.25 cw(c110.354,31.854) 109.5,31.854 R26.1@109.5,32.55 R27.1@107.25,32.55 106.525,32.733 cw(c107.373,34.566) 106.037,33.052 cw(c106.977,34.104) 105.94,33.147 cw(c106.814,33.953) 105.625,33.956 105.625,35.016 cw(c106.374,35.015) 105.844,35.544 105.975,35.675 cw(c106.518,35.132) 106.518,35.9 108.047,35.9 ccw(c108.047,37.778) 109.375,36.45 ccw(c107.866,37.959) 110,37.959 110,49.81 cw(c112.39,49.81) 110.7,51.5 ccw(c108.925,53.275) 111.435,53.275 111.435,53.875 ; 111.435,53.876 cw(c114.8,53.835) 114.796,57.2 121.573,57.2 cw(c121.573,54.446) 123.675,56.225 R25.1@124.05,55.5
DDS_VOUT_Conversor_Diff_A_Simple2_N: B4.6 B4.7 R56.1 | length 13.8
  Top Layer w0.254: R56.1@94.25,24.7 94.6,24.7 95.6,23.7 v1(97.25,23.7) ; v1(100.177,29) 100.812,29.635 B4.7@102.462,29.635 B4.6@102.462,28.365
  Signal L4 w0.254: v1(97.25,23.7) 97.337,23.7 100.004,26.367 100.004,28.75 100.177,28.923 v1(100.177,29)
DDS_VOUT_Conversor_Diff_A_Simple2_P: B4.1 B4.2 R57.1 | length 16.1
  Top Layer w0.254: R57.1@91.25,24.7 92.581,24.7 93.358,25.477 95.142,25.477 96.119,24.5 v1(97.25,24.5) ; B4.2@97.038,29.635 98.742,29.635 v1(99.377,29)
  Top Layer w0.3: B4.2@97.038,29.635 B4.1@97.038,30.905
  Signal L4 w0.254: v1(97.25,24.5) 99.55,26.8 99.55,28.75 99.377,28.923 v1(99.377,29)
DSA_VOUT_ADAPTADA_Offset1: B8.2 B8.6 R72.1 R74.2 TP61.1 | length 18.2
  Top Layer w0.2: R74.2@142.75,82.45 143.425,82.075 143.606,81.894 ccw(c144.235,82.528) 144.235,81.635 144.626,81.635 B8.2@145.288,81.635 146.466,81.635 cw(c146.466,81.435) 146.476,81.635 cw(c146.351,79.44) 147.9,81 ccw(c150.56,84.308) 148.715,80.485 148.722,80.482 ccw(c149.33,82.001) 149.326,80.365 150.05,80.365 B8.6@150.712,80.365 151.319,80.365 cw(c151.319,79.564) 151.885,80.131 ; R72.1@148.95,74.25 150.098,74.25 ccw(c150.098,76.466) 151.664,74.898 ; 151.665,74.899 ccw(c150.287,76.297) 152.25,76.297 TP61.1@152.25,77.75 152.25,79.252 ccw(c151.005,79.25) 151.885,80.13
DSA_VOUT_ADAPTADA_Offset2: B10.2 B10.6 R77.1 R79.2 TP66.1 | length 17.4
  Top Layer w0.152: R79.2@143,57.45 143.071,57.379 ccw(c144.867,59.175) 144.867,56.635 B10.2@145.288,56.635 146.849,56.635 146.85,56.635 cw(c146.85,55.15) 147.899,56.201 148.133,55.967 ccw(c149.587,57.422) 149.587,55.365 B10.6@150.712,55.365 151.399,55.36 cw(c151.336,54.699) 152,54.701 TP66.1@152,52.75 152,51.6 cw(c149.752,51.602) 151.341,50.013 ; R77.1@148.95,49.5 149.325,49.5 150.1,49.5 ccw(c150.103,51.252) 151.341,50.012
DSA_VOUT_Offset1: B8.3 B13.14 R22.2 R73.2 R74.1 TP75.1 | length 36.7
  Top Layer w0.16: R22.2@125.7,81.25 126.606,82.156 cw(c128.402,80.36) 128.402,82.9 134.548,82.9 cw(c134.548,80.36) 136.344,82.156 137.4,81.1 ccw(c138.728,82.428) 138.728,80.55 R73.2@140.5,80.55 ; B13.14@127,74.25 TP75.1@131,74.25 ccw(c131,80.648) 135.519,76.119 ; 135.519,76.119 138.752,79.352 ; 138.752,79.352 cw(c142.837,75.265) R73.2@140.5,80.55 ; B8.3@145.288,80.365 ccw(c144.841,79.918) 144.841,80.55 R73.2@140.5,80.55
DSA_VOUT_Offset2: B10.3 B14.14 R25.2 R78.2 R79.1 TP79.1 | length 36
  Top Layer w0.16: R25.2@125.95,55.5 126.82,56.37 cw(c128.1,55.089) 128.1,56.9 135.591,56.9 135.593,56.9 cw(c135.592,54.466) 137.313,56.187 137.4,56.1 ccw(c138.731,57.436) 138.732,55.55 ; B14.14@127,50 TP79.1@130.75,50 132.426,50 ccw(c132.427,55.728) 136.478,51.678 140.025,55.225 R78.2@140.75,55.55 ; 138.733,55.55 R78.2@140.75,55.55 ; B10.3@145.288,55.365 ccw(c144.841,54.918) 144.841,55.55 R79.1@143,55.55 R78.2@140.75,55.55
EARTH: J10.MH1 J10.MH2 R162.2 | length 20.6
  Top Layer w1: J10.MH2@14.25,50.76 J10.MH1@14.25,66.25
  Bottom Layer w1: J10.MH2@14.25,50.76 16.55,48.46 R162.2@16.55,46.6
ETH_INTN: B19.36 R46.2 R155.2 | length 25.5
  Top Layer w0.2: R46.2@46.65,31.2 46.65,31.525 47.048,31.923 50.823,31.923 v1(50.9,32)
  Signal L4 w0.2: v1(57.3,38.534) 57.4,38.534 59.212,40.346 v1(59.212,41.996)
  Bottom Layer w0.2: v1(50.9,32) 53.3,32 54.5,33.2 54.5,35.6 ; R155.2@53.2,36.75 53.2,36.498 53.598,36.1 54,36.1 54.5,35.6 ; v1(57.3,38.534) 57.3,36.54 56.36,35.6 54.5,35.6 ; B19.36@57.5,40.762 57.5,41.7 57.796,41.996 v1(59.212,41.996)
EXP_A0: B1.15 R28.1 R31.2 | length 8.2
  Bottom Layer w0.2: B1.15@58.3,21.475 61.474,21.475 62.449,20.5 64.2,20.5 R31.2@64.25,20.45 R28.1@64.25,22.3
EXP_A1: B1.16 R29.1 R32.2 | length 13.7
  Bottom Layer w0.2: B1.16@58.3,20.825 60.175,20.825 63.25,17.75 65.35,17.75 65.7,18.1 65.7,19.55 66.6,20.45 R32.2@66.95,20.45 R29.1@66.95,22.3
EXP_A2: B1.17 R30.1 R33.2 | length 16.8
  Bottom Layer w0.2: B1.17@58.3,20.175 59.925,20.175 63.1,17 67.3,17 68.3,18 68.3,19.436 68.779,19.916 69.314,20.45 R33.2@69.65,20.45 R30.1@69.65,22.3
EXP_RESET: B1.18 R36.1 R37.2 | length 10.7
  Bottom Layer w0.2: B1.18@58.3,19.525 59.675,19.525 63.577,15.623 63.577,15.12 63.998,14.7 R37.2@66.75,14.7